# EAGLE board Breakout_Power (EAGLE 7.5.0)
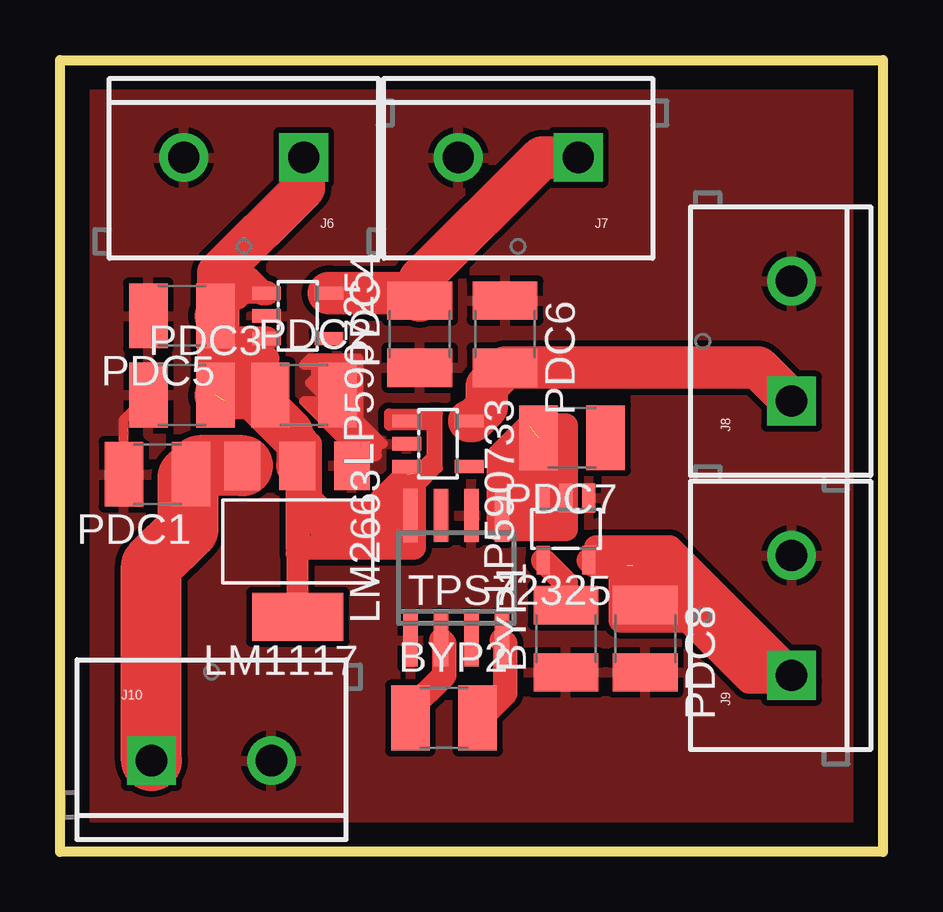
[diagram p0: board, top side]
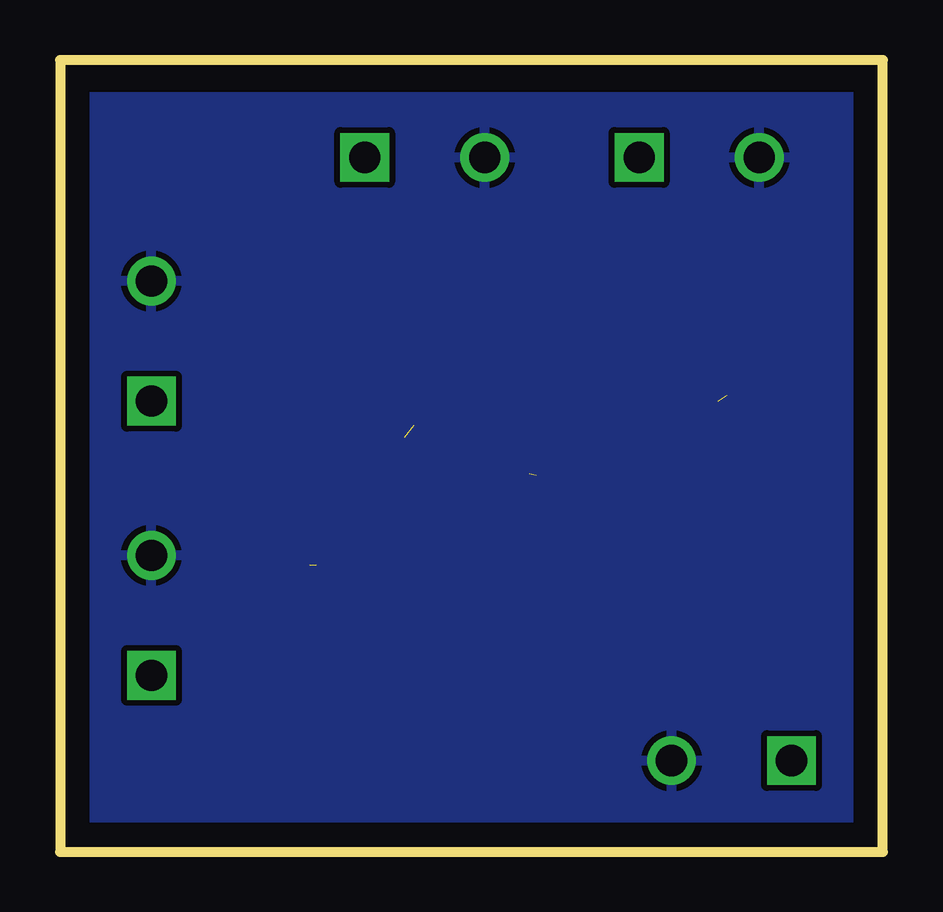
[diagram p1: board, bottom side, seen from below]

Size 34.29 x 33.02 mm. Coordinates in mm from the lower left corner, seen from the top.
Outline: 0,0 0,33.02 34.29,33.02 34.29,0 0,0
Copper layers (1*16): Top 0.035mm / dielectric 1.5mm / Bottom 0.035mm
Design rules "Standard": minimum track width 10mil, minimum drill 15mil, track to track 10mil, track to pad 10mil, pad to pad 10mil, via to via 10mil, smd to smd 10mil, copper to edge 40mil, drill to drill 10mil, minimum pad ring 8mil, minimum via ring 8mil, stop-mask expansion 4mil, vias tented up to drill 0mil, thermal gap 10mil

## Footprints (pad centres in the part's own frame; a part is rotated, then mirrored left to right if it is on the bottom)
C1210 = smd 1.6 x 2.7: 1 -1.4,0; 2 1.4,0
SCREWTERMINAL-5MM-2 = drill 1.3 pad 2.032 square: 1 0,0 | drill 1.3 pad 2.032: 2 5,0
SOT223 = smd 1.499 x 2.007: 1 -2.261,-3.15; 2 0.025,-3.15; 3 2.311,-3.15 | smd 3.81 x 2.007: 4 0,3.15
SO-08 = smd 0.6 x 2.2: 1 -1.905,-2.6; 2 -0.635,-2.6; 3 0.635,-2.6; 4 1.905,-2.6; 5 1.905,2.6; 6 0.635,2.6; 7 -0.635,2.6; 8 -1.905,2.6
SOT23-DBV = smd 0.55 x 1.2: 1 -0.95,-1.3; 2 0,-1.3; 3 0.95,-1.3; 4 0.95,1.3; 5 -0.95,1.3

## Placement (x,y rotation side)
BYP1  0.01uF  [C1210]  21.08,8.89 90 top
BYP2  47uF  [C1210]  16,5.59 0 top
J6  +3V3  [SCREWTERMINAL-5MM-2]  10.16,28.96 180 top
J7  AVDD  [SCREWTERMINAL-5MM-2]  21.59,28.96 180 top
J8  DVDD  [SCREWTERMINAL-5MM-2]  30.48,18.8 90 top
J9  AVSS  [SCREWTERMINAL-5MM-2]  30.48,7.37 90 top
J10  +5V  [SCREWTERMINAL-5MM-2]  3.81,3.81 0 top
LM1117  LM1117  [SOT223]  9.91,12.95 180 top
LM2663  LM2663  [SO-08]  16.51,11.43 0 top
LP590725  LP590725  [SOT23-DBV]  9.91,22.35 270 top
LP590733  LP590733  [SOT23-DBV]  15.75,17.02 270 top
PDC1  10uF  [C1210]  4.06,15.75 180 top
PDC2  100uF  [C1210]  10.16,19.05 0 top
PDC3  1uF  [C1210]  5.08,19.05 0 top
PDC4  1uF  [C1210]  14.99,21.59 90 top
PDC5  1uF  [C1210]  5.08,22.35 180 top
PDC6  1uF  [C1210]  18.54,21.59 270 top
PDC7  47uF  [C1210]  21.34,17.27 180 top
PDC8  2.2uF  [C1210]  24.38,8.89 270 top
TPS72325  TPS723XX25  [SOT23-DBV]  21.08,13.46 180 top

## Library data of the parts
BYP1 PDC1 PDC3-PDC6 PDC8 = resistor
BYP2 PDC2 PDC7 = rcl
J6-J10 = SparkFun-Connectors; STOREFRONT_ID: PRT-08432
LM1117 = ads1299; MPN: REG1117; OC_FARNELL: 1097566; OC_NEWARK: 14P6981
LM2663 = ads1299
LP590725 TPS72325 = ads1299; MF: TEXAS INSTRUMENTS; MPN: TPS77025DBVR; OC_FARNELL: 1412881; OC_NEWARK: 77C1178
LP590733 = ads1299; MF: TEXAS INSTRUMENTS; MPN: TPS77033DBVT; OC_FARNELL: 8461570; OC_NEWARK: 77C1187

## Nets
+3V3: J6.1 LM1117.2 LM2663.8 LP590725.1 LP590733.1 PDC3.2 PDC5.1
+5V: J10.1 LM1117.3 PDC1.1
-3V3: LM2663.5 PDC7.2 TPS72325.2
AVDD: J7.1 LP590725.5 PDC4.2
AVSS: J9.1 TPS72325.5
DVDD: J8.1 LP590733.5 PDC6.2
GND: BYP1.1 J6.2 J7.2 J8.2 J9.2 J10.2 LM1117.1 LM2663.1 LM2663.6 LP590725.2 LP590733.2 PDC1.2 PDC2.2 PDC3.1 PDC4.1 PDC5.2 PDC6.1 PDC8.2 TPS72325.1
N$1: LM1117.4 PDC2.1
N$2: LP590725.3
N$3: LP590733.3
N$4: LM2663.3
N$5: PDC7.1
N$6: TPS72325.3
N$7: PDC8.1
N$34: BYP1.2 TPS72325.4
N$35: BYP2.1 LM2663.2
N$36: BYP2.2 LM2663.4

## Tracks (layer width: path | path; a pad name or v marks a point on that pad's centre or on a via)
+3V3  (2 unrouted)
  Top 0.406: 15.05,16.07 15.49,16.51 15.49,17.78 13.72,17.78 13.72,18.29 15.49,18.29 | 15.49,18.29 15.49,16 14.73,15.24 14.99,15.24 15.75,16 15.75,18.29 15.49,18.29 | 15.49,18.29 15.24,18.03 14.51,18.03 LP590733.1
  Top 1.016: LP590725.1 8.45,23.3 7.87,23.88 7.11,23.11 7.37,23.11 7.62,23.37 | 7.62,23.37 8.13,23.37 | 7.62,23.37 7.11,23.37 6.6,22.86 | 9.91,16.13 9.91,12.7 10.16,12.7 | 10.16,12.7 14.73,12.7 14.73,15.24 14.73,15.78 | 14.45,13.69 13.72,12.95 12.7,12.95 12.7,13.21 13.72,14.22 13.72,14.73 | 13.72,14.99 11.68,12.95 11.43,12.95 10.67,13.72 10.67,13.97 | 10.67,13.97 10.67,14.48 | LM2663.8 10.73,14.03 10.67,13.97 | 14.45,15.72 13.72,14.99 | 13.72,14.99 13.72,14.73 | 13.72,14.73 13.21,14.22 10.92,14.22 10.41,14.73 10.41,17.02 9.4,17.02 7.87,18.54 7.11,18.54 6.86,18.8 | 9.91,12.45 10.16,12.7
  Top 1.778: J6.1 10.16,27.69 6.6,24.13 6.6,22.86 6.6,22.48 | 6.6,22.48 PDC5.1 | 6.6,22.48 6.6,19.17 | 6.6,19.17 PDC3.2 | 6.6,19.17 8.64,19.17 | 8.76,18.42 9.65,17.53 9.65,17.27 9.91,17.02 9.91,16.13 LM1117.2
+5V
  Top 2.54: J10.1 3.81,11.94 5.33,13.46 5.33,15.62 PDC1.1 5.82,16.1 LM1117.3
-3V3  (1 unrouted)
  Top 1.016: LM2663.5 18.41,16.64 19.56,17.78 21.08,17.78 TPS72325.2 | TPS72325.2 21.08,13.46 18.29,13.46 18.29,16.51 18.54,16.51 18.8,16.26 18.8,14.22 19.05,13.97 20.07,13.97 20.32,14.22 20.32,15.75 19.56,15.75 19.56,14.73 20.07,14.73 | 20.07,14.73 20.1,14.73 21.05,14.73 TPS72325.2 | 20.1,14.76 20.07,14.73 | 20.13,17.08 PDC7.2
AVDD
  Top 1.778: J7.1 20.07,28.96 14.99,23.88 PDC4.2 14.67,23.3 LP590725.5
AVSS  (1 unrouted)
  Top 1.016: J9.1 25.65,12.19 24.64,12.19 29.72,7.11 | 29.72,7.11 30.23,7.11 | 30.23,7.11 J9.1 | J9.1 29.97,7.37 29.72,7.11 | 29.72,7.11 28.7,7.11 26.16,9.65 | 26.16,9.65 23.37,9.65 23.37,11.68 22.35,12.7 25.4,12.7 30.99,7.11 30.23,7.11 | 26.16,9.65 23.88,11.94 23.88,10.8 | 24.38,11.18 23.62,11.94 22.26,11.94 TPS72325.5
DVDD
  Top 1.778: J8.1 29.09,20.19 PDC6.2 17.78,19.43 17.78,18.54 17.21,17.97 LP590733.5
GND
  Top 0.406: LM1117.1 12.17,16.79 10.16,18.8 10.67,18.8 12.95,16.51 13.21,16.51 13.21,16.76 10.41,19.56 10.67,19.81 12.45,18.03 | 13.46,17.02 12.45,18.03 | 12.45,18.03 12.45,20.57 10.41,20.57 10.16,20.32 10.67,20.32 10.92,20.07 10.67,20.07 10.67,19.94 PDC2.2 | PDC1.2 2.66,18.03 PDC3.1
  pour Top (isolate 0.254): 0.76,32.26 33.27,32.26 33.27,0.76 0.76,0.76
  pour Bottom: 1.02,31.5 1.02,1.27 33.02,1.27 33.02,2.03 33.02,30.99 33.02,31.24 33.02,31.5
N$1
  Top 0.406: LM1117.4 9.65,9.8 9.65,12.95 9.91,12.95 9.91,10.16 10.41,10.16 10.41,10.41 10.16,10.41 10.16,17.65 PDC2.1
N$2
  Top 1.016: LP590725.3 7.43,21.4 7.37,21.34 7.37,20.83 7.87,20.32 8.38,20.32 8.64,20.57 8.13,20.57 7.87,20.83 7.87,19.94
N$34
  Top 1.016: BYP1.2 21.08,11.21 TPS72325.4
N$35
  Top 1.016: BYP2.1 14.6,5.97 16,7.37 16,8.7 LM2663.2
N$36
  Top 1.016: BYP2.2 17.53,5.59 18.54,6.6 18.54,8.7 LM2663.4